# EAGLE board Expansion_board (EAGLE 9.2.0)
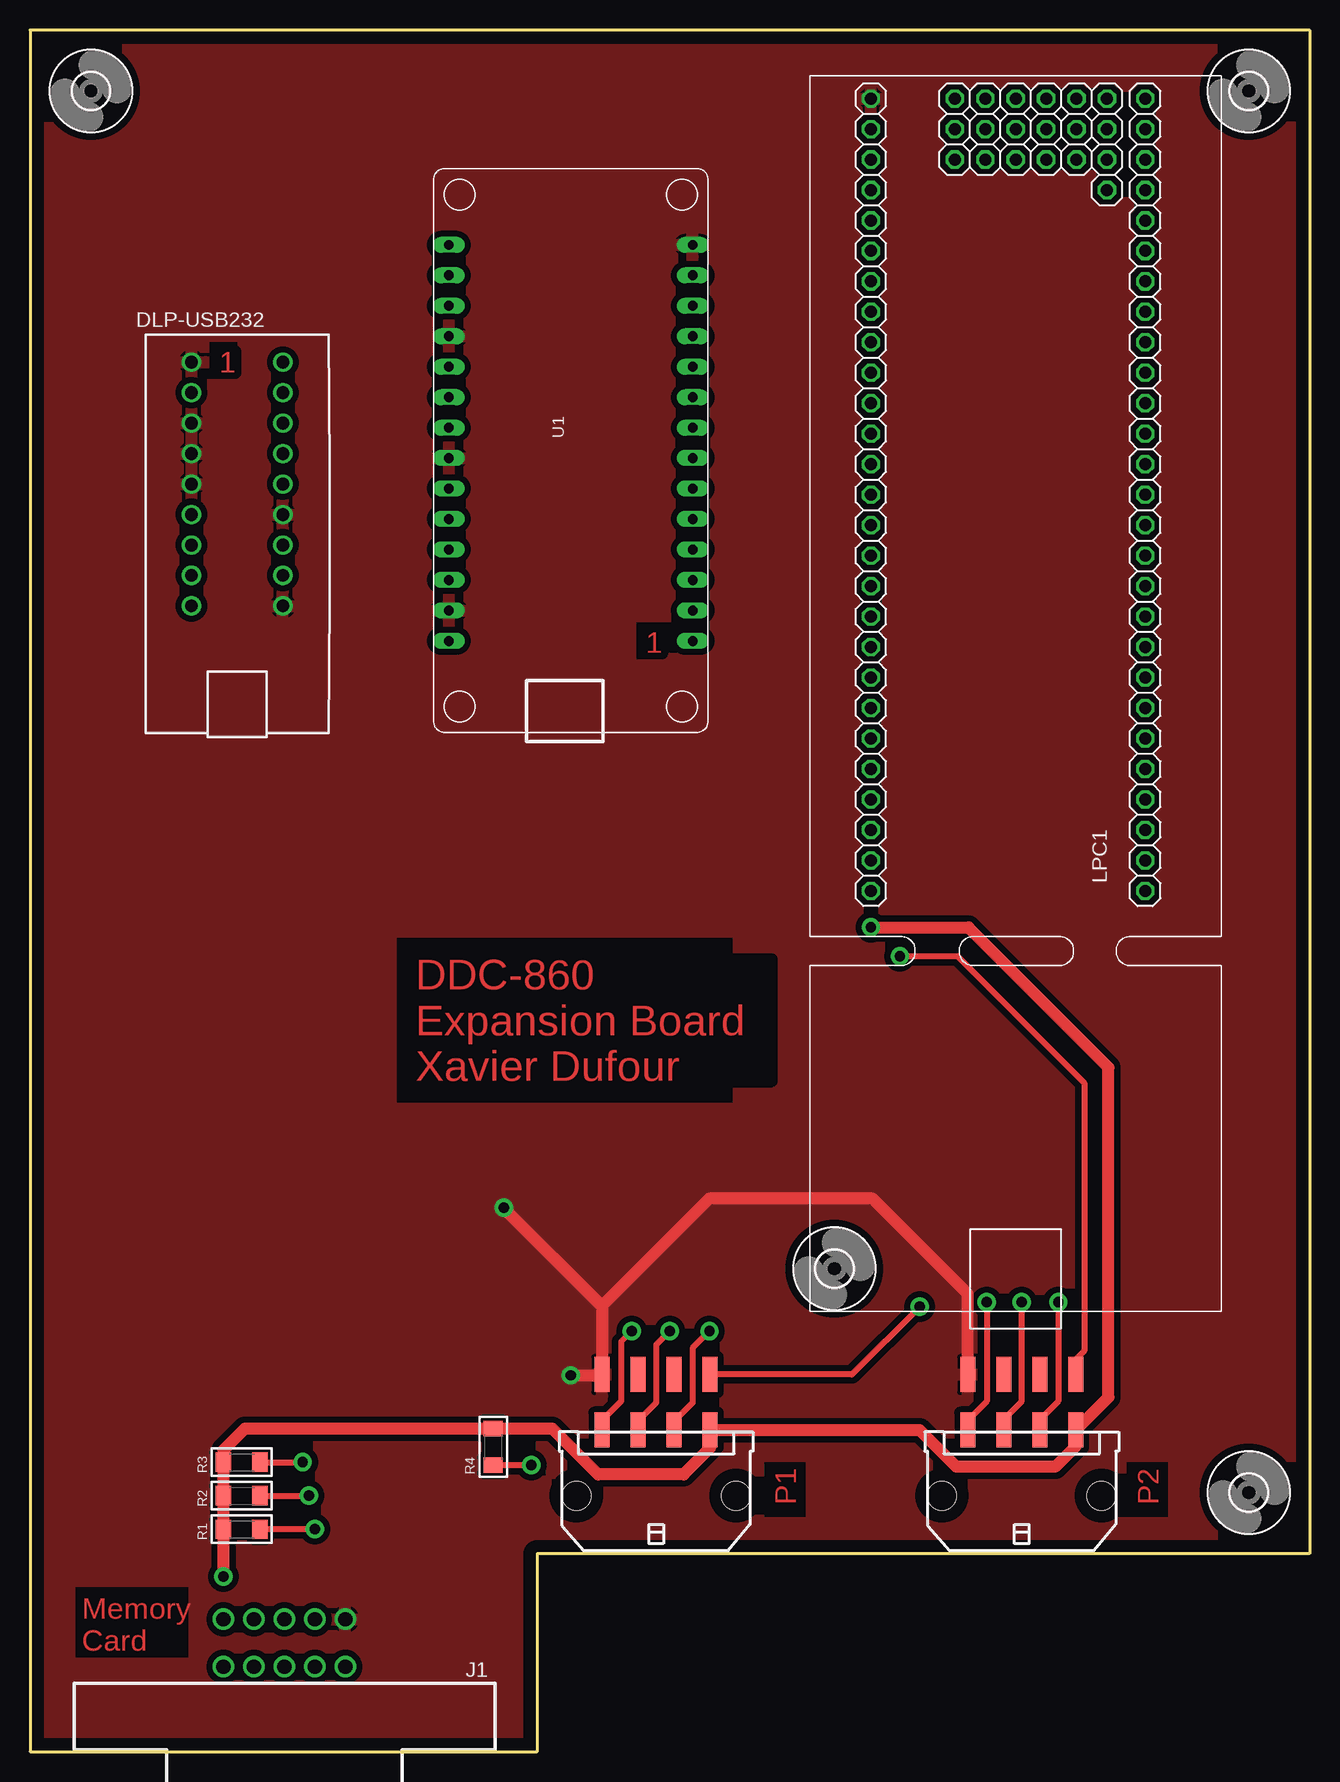
[diagram p0: board, top side]
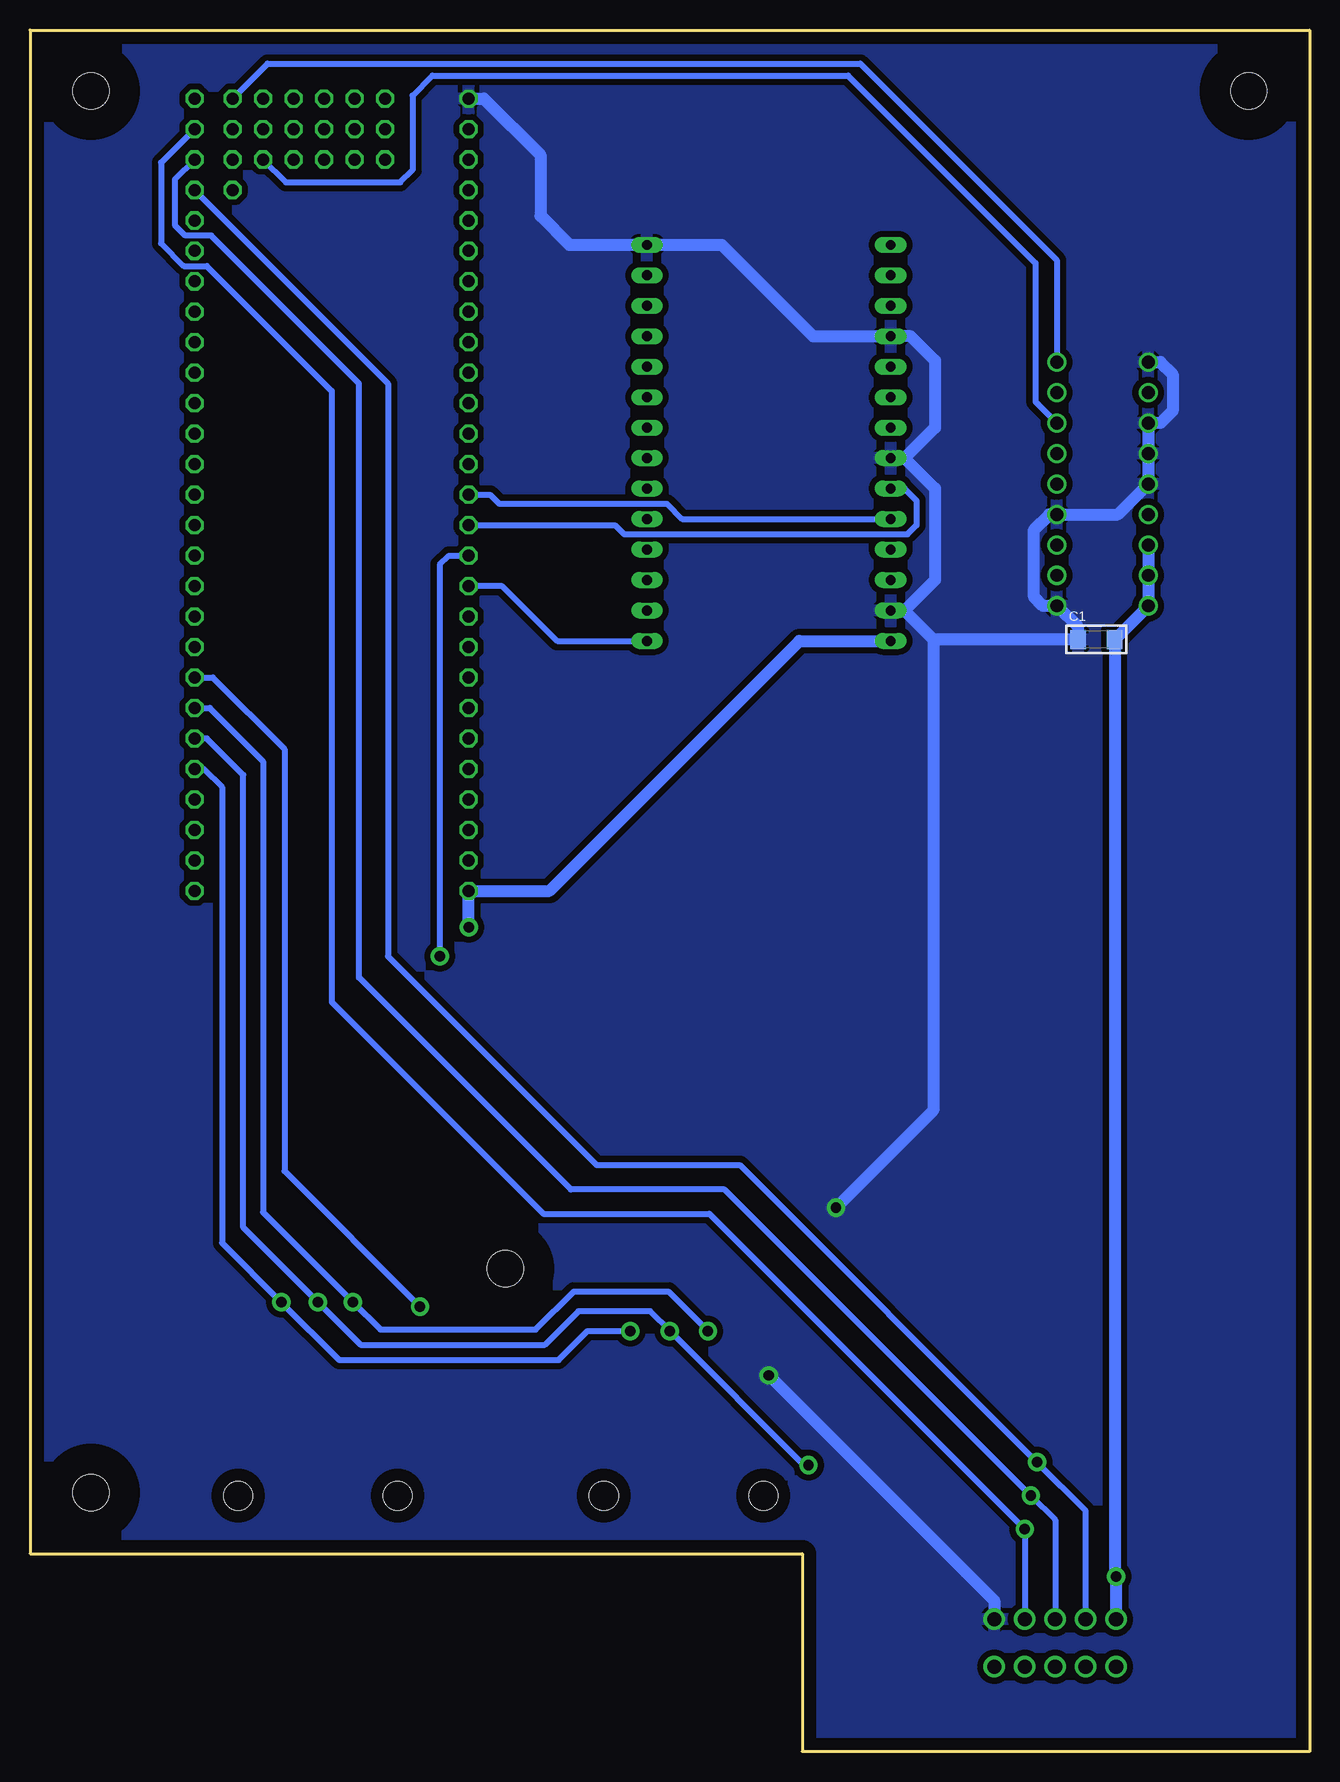
[diagram p1: board, bottom side, seen from below]

Size 106.68 x 143.51 mm. Coordinates in mm from the lower left corner, seen from the top.
Outline: 0,0 42.29,0 42.29,16.51 106.68,16.51 106.68,143.51 0,143.51 0,0
Copper layers (1*16): Top 0.035mm / dielectric 1.5mm / Bottom 0.035mm
Design rules "DRCmasse": minimum track width 20mil, minimum drill 1mil, track to track 20mil, track to pad 50mil, pad to pad 10mil, via to via 10mil, smd to smd 8mil, copper to edge 40mil, drill to drill 8mil, minimum pad ring 10mil, minimum via ring 8mil, stop-mask expansion 0mil, vias tented up to drill 0mil, thermal gap 10mil
tRestrict: area 3.8,7.9 to 13.2,13.7; area 50.5,91.1 to 52.8,94.1; area 30.6,54.1 to 58.5,67.8; area 61.2,19.6 to 64.6,24.1; area 91.4,19.6 to 94.9,24.1; area 15,114.4 to 17.3,117.5

## Footprints (pad centres in the part's own frame; a part is rotated, then mirrored left to right if it is on the bottom)
C1206 = smd 1.3 x 1.6: 1 -1.524,0; 2 1.524,0
3MM_HOLE = hole 3: 0,0
EDGE_CON_10POS = drill 1.194: 1 -5.08,-3.924; 2 -2.54,-3.924; 3 0,-3.924; 4 2.54,-3.924; 5 5.08,-3.924; 6 -5.08,0.038; 7 -2.54,0.038; 8 0,0.038; 9 2.54,0.038; 10 5.08,0.038
MOLEX43045_0806 = smd 1.27 x 2.92: 1 4.5,5.47; 2 1.5,5.47; 3 -1.5,5.47; 4 -4.5,5.47; 5 4.5,10.1; 6 1.5,10.1; 7 -1.5,10.1; 8 -4.5,10.1 | hole 2.41: -6.65,0; 6.65,0
LPCXPRESSO_LPC1769 = drill 1 octagon: 1 -18.161,-11.049; 2 -15.621,-11.049; 3 -13.081,-11.049; 4 -10.541,-11.049; 5 -8.001,-11.049; 6 -5.461,-11.049; 7 -2.921,-11.049; 8 -0.381,-11.049; 9 2.159,-11.049; 10 4.699,-11.049; 11 7.239,-11.049; 12 9.779,-11.049; 13 12.319,-11.049; 14 14.859,-11.049; 15 17.399,-11.049; 16 19.939,-11.049; 17 22.479,-11.049; 18 25.019,-11.049; 19 27.559,-11.049; 20 30.099,-11.049; 21 32.639,-11.049; 22 35.179,-11.049; 23 37.719,-11.049; 24 40.259,-11.049; 25 42.799,-11.049; 26 45.339,-11.049; 27 47.879,-11.049; 28 -18.161,11.811; 29 -15.621,11.811; 30 -13.081,11.811; 31 -10.541,11.811; 32 -8.001,11.811; 33 -5.461,11.811; 34 -2.921,11.811; 35 -0.381,11.811; 36 2.159,11.811; 37 4.699,11.811; 38 7.239,11.811; 39 9.779,11.811; 40 12.319,11.811; 41 14.859,11.811; 42 17.399,11.811; 43 19.939,11.811; 44 22.479,11.811; 45 25.019,11.811; 46 27.559,11.811; 47 30.099,11.811; 48 32.639,11.811; 49 35.179,11.811; 50 37.719,11.811; 51 40.259,11.811; 52 42.799,11.811; 53 45.339,11.811; 54 47.879,11.811; 55 40.259,-7.874; 56 42.799,-7.874; 57 45.339,-7.874; 58 47.879,-7.874; 59 42.799,-5.334; 60 45.339,-5.334; 61 47.879,-5.334; 62 42.799,-2.794; 63 45.339,-2.794; 64 47.879,-2.794; 65 42.799,-0.254; 66 45.339,-0.254; 67 47.879,-0.254; 68 42.799,2.286; 69 45.339,2.286; 70 47.879,2.286; 71 42.799,4.826; 72 45.339,4.826; 73 47.879,4.826
R1206 = smd 1.3 x 1.6: 1 -1.524,0; 2 1.524,0
AUDIO_FX_SOUND_BOARD = drill 0.813 long: 1 -16.51,-10.033; 2 -13.97,-10.033; 3 -11.43,-10.033; 4 -8.89,-10.033; 5 -6.35,-10.033; 6 -3.81,-10.033; 7 -1.27,-10.033; 8 1.27,-10.033; 9 3.81,-10.033; 10 6.35,-10.033; 11 8.89,-10.033; 12 11.43,-10.033; 13 13.97,-10.033; 14 16.51,-10.033; 15 16.51,10.287; 16 13.97,10.287; 17 11.43,10.287; 18 8.89,10.287; 19 6.35,10.287; 20 3.81,10.287; 21 1.27,10.287; 22 -1.27,10.287; 23 -3.81,10.287; 24 -6.35,10.287; 25 -8.89,10.287; 26 -11.43,10.287; 27 -13.97,10.287; 28 -16.51,10.287
DLP-USB232 = drill 1.067 pad 1.524: 1 3.81,30.988; 2 3.81,28.448; 3 3.81,25.908; 4 3.81,23.368; 5 3.81,20.828; 6 3.81,18.288; 7 3.81,15.748; 8 3.81,13.208; 9 3.81,10.668; 10 11.43,10.668; 11 11.43,13.208; 12 11.43,15.748; 13 11.43,18.288; 14 11.43,20.828; 15 11.43,23.368; 16 11.43,25.908; 17 11.43,28.448; 18 11.43,30.988

## Placement (x,y rotation side)
C1  0.1µF  [C1206]  17.78,92.71 0 bottom
H1  SCREW_MOUNT_HOLE3.0  [3MM_HOLE]  67.06,40.26 0 top
H2  SCREW_MOUNT_HOLE3.0  [3MM_HOLE]  5.08,138.43 0 top
H3  SCREW_MOUNT_HOLE3.0  [3MM_HOLE]  101.6,138.43 0 top
H4  SCREW_MOUNT_HOLE3.0  [3MM_HOLE]  101.6,21.59 0 top
J1  EDGE_CON_10POS  [EDGE_CON_10POS]  21.21,7.11 180 top
J2  PS2_PAD1  [MOLEX43045_0806]  52.2,21.34 0 top
J3  PS2_PAD2  [MOLEX43045_0806]  82.68,21.34 0 top
LPC1  [LPCXPRESSO_LPC1769]  81.92,89.92 90 top
R1  1K  [R1206]  17.65,18.54 180 top
R2  1K  [R1206]  17.65,21.34 180 top
R3  10K  [R1206]  17.65,24.13 180 top
R4  1K  [R1206]  38.61,25.4 90 top
U1  ADAFRUIT_AUDIO  [AUDIO_FX_SOUND_BOARD]  45.21,109.09 90 top
U$1  [DLP-USB232]  9.65,84.84 0 top

## Library data of the parts
C1 H1-H4 J1-J3 LPC1 R1-R4 U1 = xavier
U$1 = DLP-USB232

## Nets
+3V3: C1.2 J1.5 J2.1 J3.1 LPC1.28 R1.2 R2.2 R3.2 R4.2 U1.28 U$1.7 U$1.8 U$1.9
ATT1: J2.5 LPC1.8
ATT2: J3.5 LPC1.39
GND: C1.1 J1.1 J2.8 J3.8 LPC1.54 U1.14 U1.18 U1.22 U1.27 U$1.1 U$1.3 U$1.4 U$1.5 U$1.10 U$1.13
M_DETECT: J1.4 LPC1.24 R3.1
MISO1: J2.3 J3.3 LPC1.6 R4.1
MOSI1: J2.2 J3.2 LPC1.5
RST: LPC1.38 U1.1
RXD2: LPC1.41 U1.24
RXD3: LPC1.58 U$1.18
SCK1: J2.4 J3.4 LPC1.7
SCL0: J1.2 LPC1.26 R1.1
SDA0: J1.3 LPC1.25 R2.1
TXD2: LPC1.40 U1.23
TXD3: LPC1.59 U$1.16

## Tracks (layer width: path | path; a pad name or v marks a point on that pad's centre or on a via)
+3V3  (via drill 0.86 pad 1.52)
  Top 0.61: 56.71,26.8 J2.1
  Top 1.016: 56.71,26.8 74.17,26.8 77.22,23.75 85.47,23.75 87.18,25.45 J3.1 89.92,29.55 89.92,57.02 78.23,68.71 v70.1,68.71 | J2.1 56.7,25.33 54.48,23.11 47.37,23.11 43.56,26.92 R4.2 17.91,26.92 16.13,25.15 R3.2 R2.2 R1.2 v16.13,14.61
  Bottom 1.016: U1.28 42.55,92.58 63.37,71.75 LPC1.28 v70.1,68.71 | J1.5 v16.13,14.61 16.26,14.73 C1.2 U$1.9 U$1.8 U$1.7
ATT1  (via drill 0.86 pad 1.52)
  Top 0.508: J2.5 68.52,31.44 v74.17,37.08
  Bottom 0.508: LPC1.8 91.44,89.53 85.47,83.57 85.47,48.39 v74.17,37.08
ATT2  (via drill 0.86 pad 1.52)
  Top 0.508: J3.5 87.18,32.69 87.88,33.4 87.88,55.75 77.34,66.29 v72.52,66.29
  Bottom 0.508: LPC1.39 71.75,99.69 72.52,98.93 v72.52,66.29
GND  (via drill 0.86 pad 1.52)
  Top 1.016: J3.8 78.18,38.16 70.23,46.1 56.64,46.1 47.7,37.16 | 47.7,37.16 J2.8 47.63,31.37 v45.09,31.37 | v39.5,45.34 47.68,37.16 47.7,37.16
  Bottom 1.016: U1.18 41.4,117.98 49.02,125.6 U1.14 61.72,125.6 64.14,128.02 64.14,133.1 68.83,137.79 LPC1.54 | 33.78,107.82 31.24,110.36 31.24,115.95 33.27,117.98 U1.18 | U1.22 33.78,107.82 | 33.78,95.12 31.24,97.66 31.24,105.28 33.78,107.82 | U1.27 33.78,95.12 | v39.5,45.34 31.37,53.47 31.37,92.71 | 33.78,95.12 31.37,92.71 | v45.09,31.37 26.29,12.57 J1.1 | U$1.1 12.45,115.82 11.43,114.81 11.43,111.76 12.45,110.74 U$1.3 U$1.4 U$1.5 16,103.12 U$1.13 21.72,103.12 22.99,101.85 22.99,96.27 22.23,95.5 U$1.10 19.3,93.73 C1.1 31.37,92.71 | U1.18
  pour Bottom: -8,150.37 117.98,150.37 117.98,-8.64 -8,-8.64
  pour Top: -8,150.37 117.98,150.37 117.98,-8.64 -8,-8.64
M_DETECT  (via drill 0.86 pad 1.52)
  Top 0.508: R3.1 v22.73,24.13
  Bottom 0.508: LPC1.24 76.83,114.05 76.83,66.29 59.44,48.9 47.5,48.9 v22.73,24.13 18.67,20.07 J1.4
MISO1  (via drill 0.86 pad 1.52)
  Top 0.508: J3.3 81.18,27.71 82.68,29.21 v82.68,37.47 | v53.34,35.05 52.2,33.91 52.2,29.08 50.7,27.58 J2.3 | v41.78,23.88 R4.1
  Bottom 0.508: LPC1.6 91.95,84.45 88.9,81.41 88.9,43.69 v82.68,37.47 79.12,33.91 63.75,33.91 60.96,36.7 54.99,36.7 v53.34,35.05 42.16,23.88 v41.78,23.88
MOSI1  (via drill 0.86 pad 1.52)
  Top 0.508: v85.72,37.47 85.72,29.21 84.18,27.66 J3.2 | J2.2 53.7,27.54 55.24,29.08 55.24,33.66 v56.64,35.05
  Bottom 0.508: LPC1.5 92.2,81.92 90.68,80.39 90.68,42.42 v85.72,37.47 80.9,32.64 62.61,32.64 60.2,35.05 v56.64,35.05
RST
  Bottom 0.508: U1.1 62.74,92.58 67.31,97.16 LPC1.38
RXD2
  Bottom 0.508: U1.24 52.32,102.74 53.59,104.01 67.56,104.01 68.33,104.78 LPC1.41
RXD3
  Bottom 0.508: LPC1.58 86.87,140.72 37.47,140.72 21.08,124.33 U$1.18
SCK1  (via drill 0.86 pad 1.52)
  Top 0.508: v79.76,37.47 79.76,29.21 78.18,27.63 J3.4 | v50.16,35.05 49.28,34.16 49.28,29.21 47.7,27.63 J2.4
  Bottom 0.508: LPC1.7 91.69,87 87.25,82.55 87.25,44.96 v79.76,37.47 77.47,35.18 64.52,35.18 61.34,38.35 53.47,38.35 v50.16,35.05
SCL0  (via drill 0.86 pad 1.52)
  Top 0.508: v23.75,18.54 R1.1
  Bottom 0.508: LPC1.26 95.76,132.46 95.76,125.73 93.85,123.83 91.95,123.83 81.53,113.41 81.53,62.48 63.88,44.83 50.04,44.83 v23.75,18.54 J1.2
SDA0  (via drill 0.86 pad 1.52)
  Top 0.508: R2.1 v23.24,21.34
  Bottom 0.508: LPC1.25 94.61,131.06 94.61,127.25 93.73,126.36 91.57,126.36 79.25,114.05 79.25,64.52 61.59,46.86 48.77,46.86 v23.24,21.34 21.21,19.3 J1.3
TXD2
  Bottom 0.508: LPC1.40 57.91,102.23 57.15,101.47 33.53,101.47 32.77,102.23 32.77,104.27 33.78,105.28 U1.23
TXD3
  Bottom 0.508: U$1.16 22.86,112.52 22.86,124.08 38.48,139.7 73.15,139.7 74.8,138.05 74.8,131.83 75.82,130.81 85.34,130.81 LPC1.59

## Text on the board
Top: 1 | 1 | DDC-860 / Expansion Board / Xavier Dufour | P1 | P2 | Memory / Card